# Altium PCB Main.PcbDoc
Units mm, origin at the board's own origin, x right, y up, seen from the top; angles counter-clockwise.
Board outline 37 x 67 mm, 4 copper layers (Top Layer, Ground Layer, Power Layer, Bottom Layer), stack 1.591 mm thick; 41 components, 75 nets, 233 pads, 49 vias.
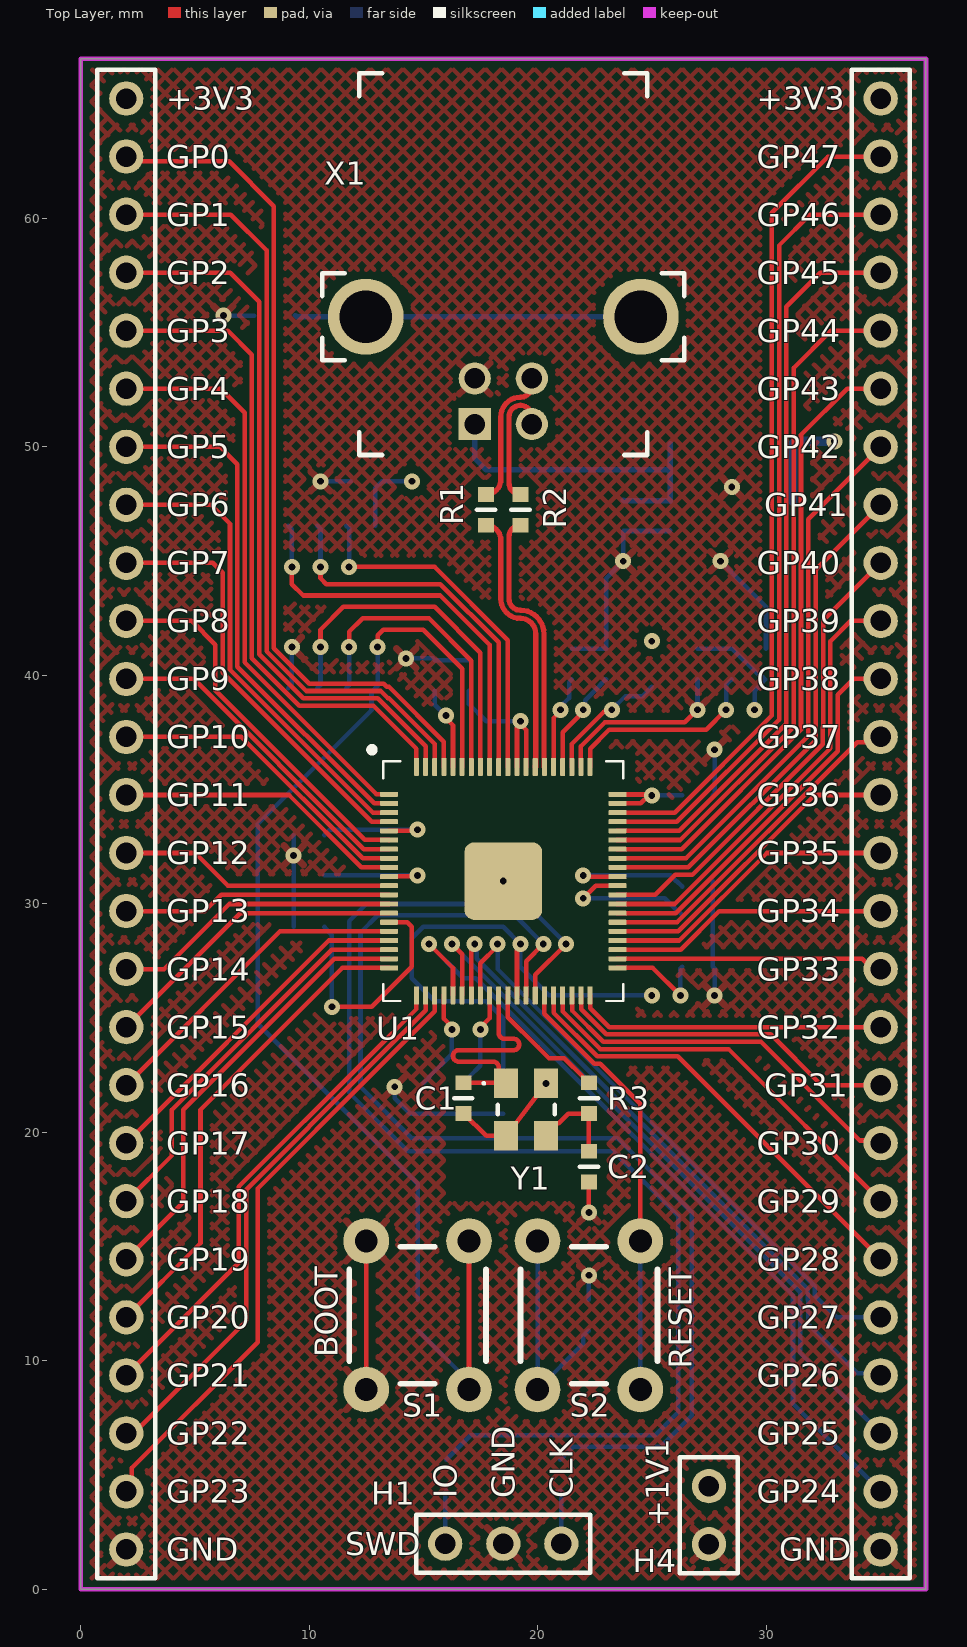
[diagram p0: Top Layer view]
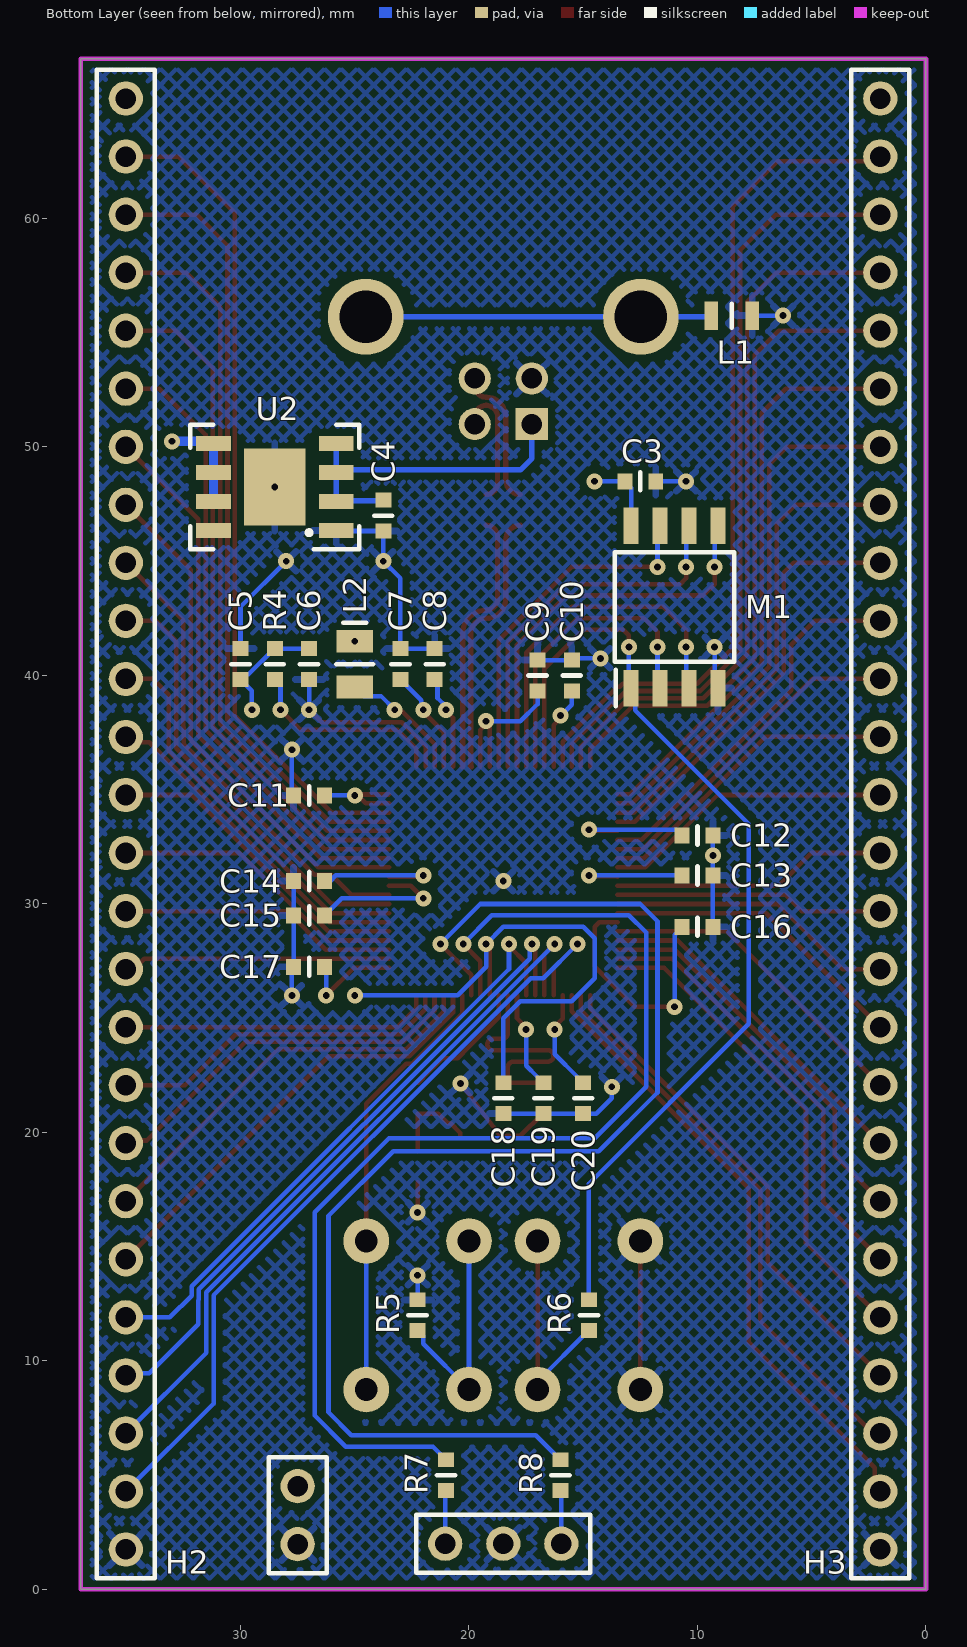
[diagram p1: Bottom Layer view, seen from below]
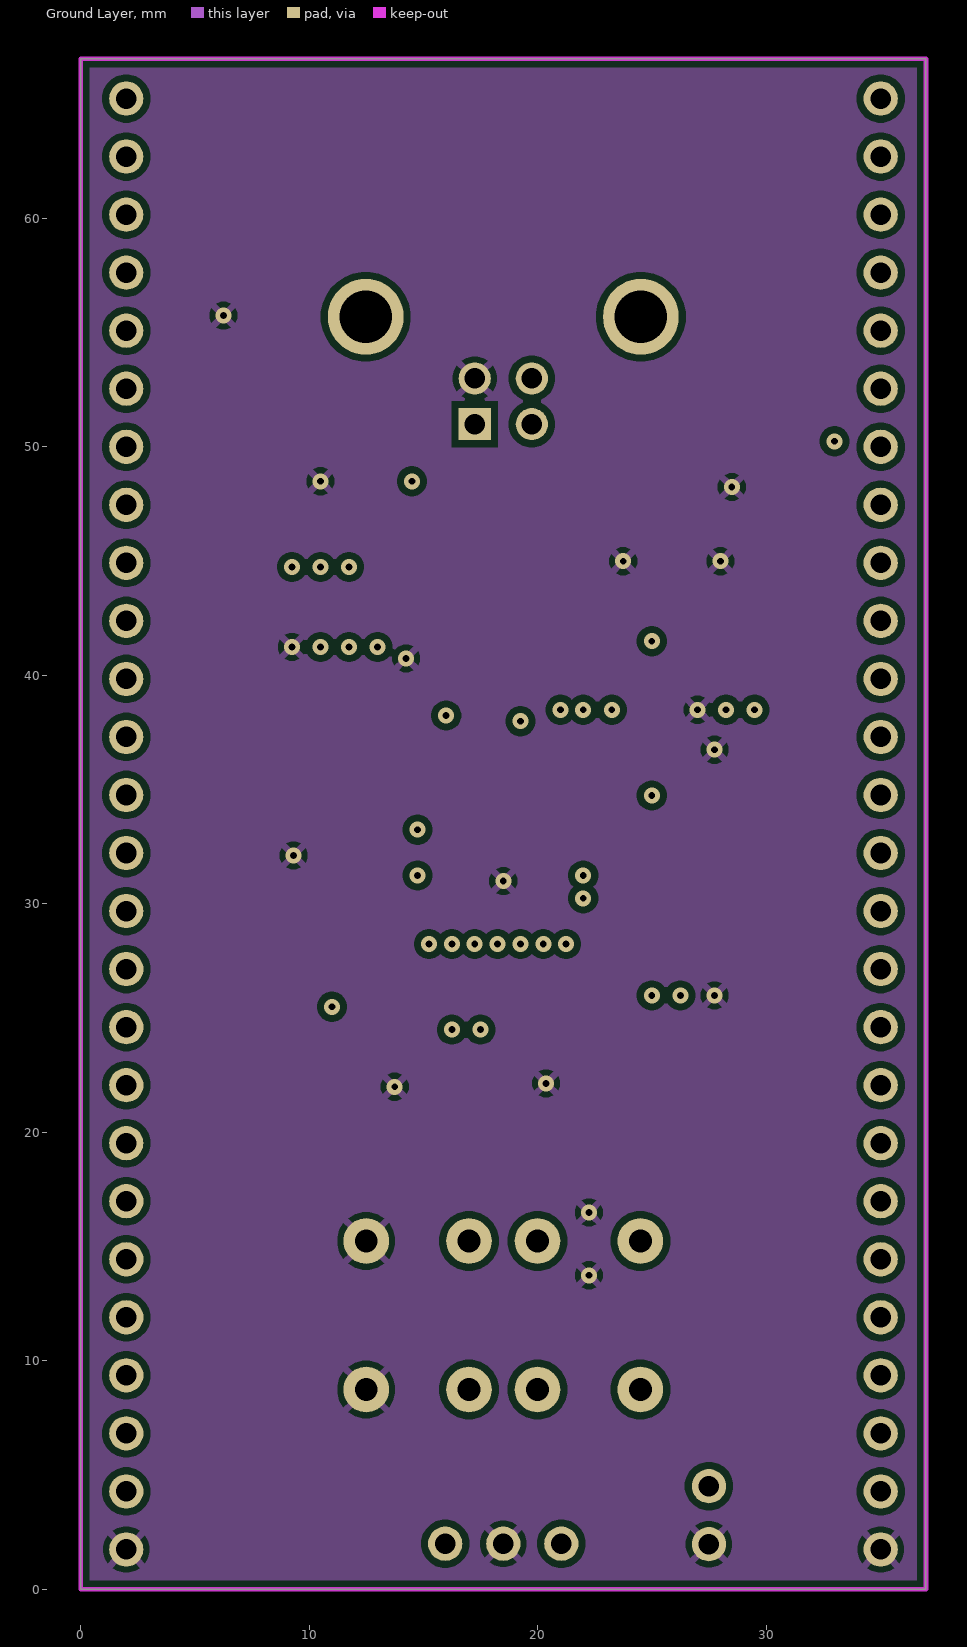
[diagram p2: Ground Layer]
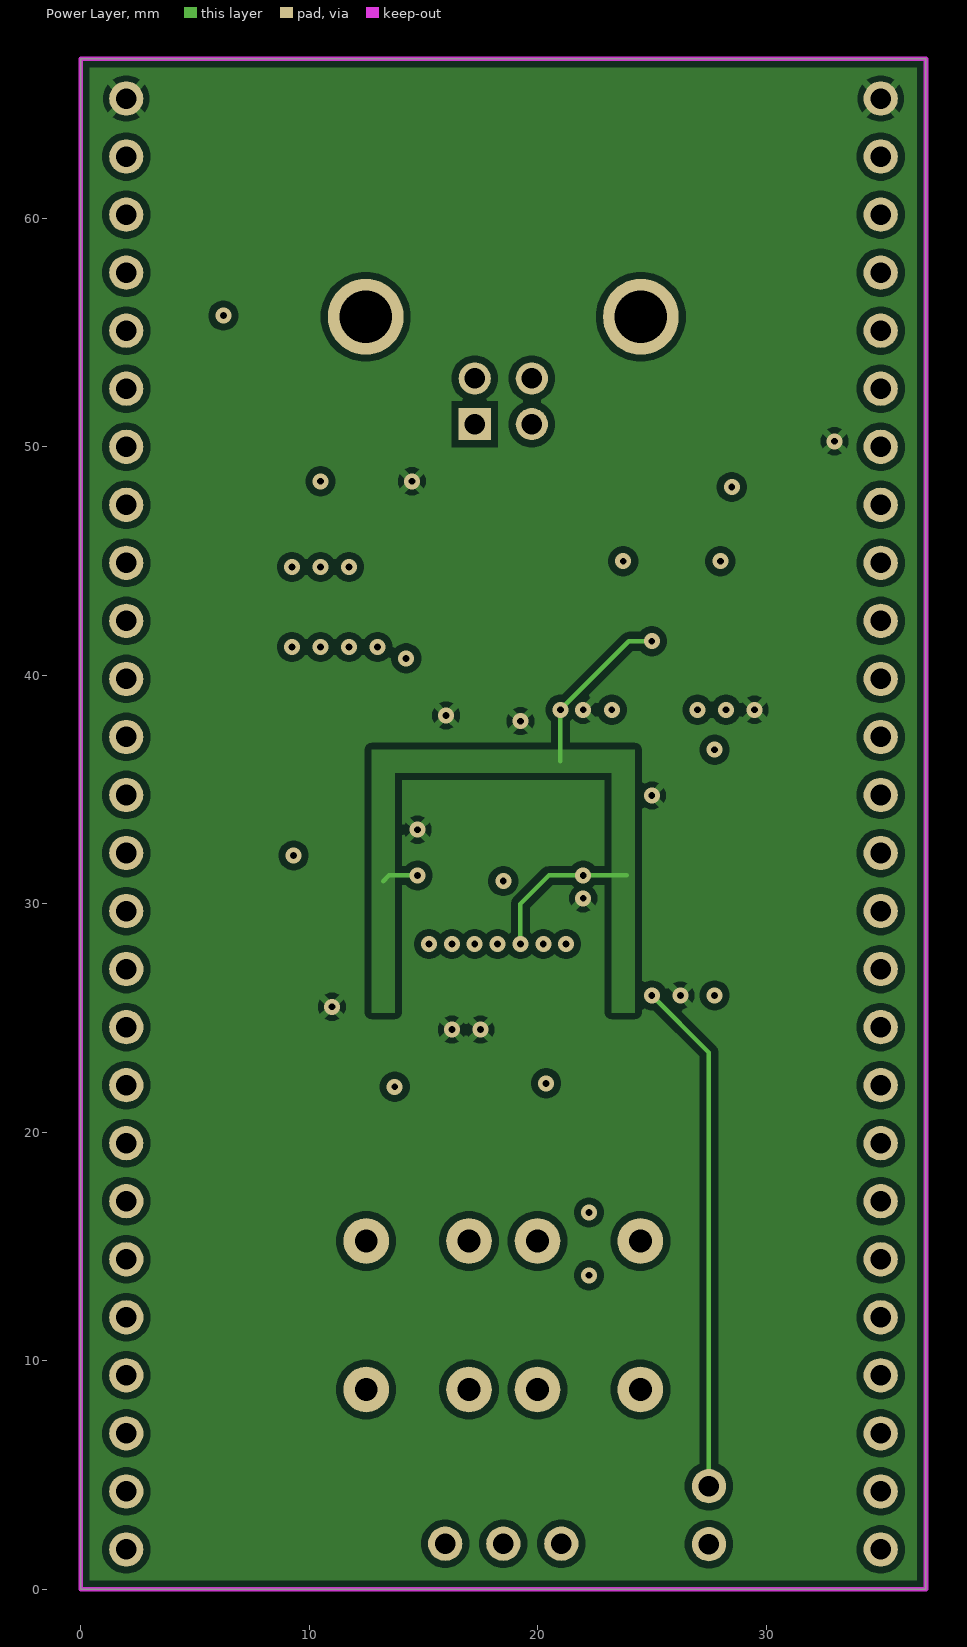
[diagram p3: Power Layer]

## Layer stack, top to bottom
Top Solder: solder mask 0.0102, Solder Resist, Dk 3.8
Top Layer: signal copper 0.035
Dielectric 2: prepreg 0.2104, 7628*1, Dk 4.4
Ground Layer: signal copper 0.0175
Dielectric 1: dielectric 1.065, FR-4, Dk 4.8
Power Layer: signal copper 0.0175
Dielectric 3: prepreg 0.2104, 7628*1, Dk 4.4
Bottom Layer: signal copper 0.035
Bottom Solder: solder mask 0.0102, Solder Resist, Dk 3.8

## Board outline
0,0 0,67 37,67 37,0

## Design rules (kind name [scope] priority, off if disabled: settings)
BoardOutlineClearance [All] p1: gap=0.2 ignorepadtopadclearanceinfootprint=FALSE
Clearance "inPolygon Clearance" [InPolygon] p1: gap=0.3 ignorepadtopadclearanceinfootprint=TRUE // this rule ensures that every net within a polygon of a different net has a set clearance from the poly
Clearance "Different Diff Pair" [All] p2: gap=0.2 ignorepadtopadclearanceinfootprint=TRUE
Clearance "Same Diff Pair" [All] p3: gap=0.1 ignorepadtopadclearanceinfootprint=TRUE
Clearance "Different Nets" [not InAnyDifferentialPair] p4: gap=0.3 ignorepadtopadclearanceinfootprint=TRUE except(0.1: Arc-SMDPad Arc-THPad Arc-Via Arc-Text Track-SMDPad Track-THPad Track-Via Track-Text SMDPad-Text THPad-Text Via-Text Fill-Text Poly-Text Region-Text Text-Text; 0.12: Arc-Arc Arc-Track Track-Track; 0.15: SMDPad-SMDPad SMDPad-THPad SMDPad-Via THPad-THPad THPad-Via Via-Via; 0.2: Arc-Hole Track-Hole SMDPad-Hole THPad-Hole Via-Hole Fill-Hole Poly-Hole Region-Hole Text-Hole)
Clearance "Same Net" [not InAnyDifferentialPair] p5: gap=0 ignorepadtopadclearanceinfootprint=TRUE except(0.1: THPad-Via; 0.18: Arc-Arc Arc-Track Track-Track)
ComponentClearance [All] p1: gap=0.102 collisioncheckmode=3 verticalgap=0.102 showdistances=TRUE
DiffPairsRouting "Ethernet Routing" [InDifferentialPairClass('Ethernet_Pairs')] p1: maxlimit=0.25 minlimit=0.2 mostfreqgap=0.25 toplayer_maxgap=0.2 toplayer_prefgap=0.2 toplayer_minwidth=0.25 toplayer_maxwidth=0.25 toplayer_prefwidth=0.25 midlayer1_mingap=0.25 midlayer1_minwidth=0.19 midlayer1_maxwidth=0.19 midlayer1_prefwidth=0.19 midlayer2_mingap=0.25 midlayer2_minwidth=0.19 midlayer2_maxwidth=0.19 midlayer2_prefwidth=0.19 bottomlayer_maxgap=0.2 bottomlayer_prefgap=0.2 bottomlayer_minwidth=0.25 bottomlayer_maxwidth=0.25 bottomlayer_prefwidth=0.25 impedanceprofiledriven=TRUE maxuncoupledlength=12.7
DiffPairsRouting "USB Routing" [InDifferentialPairClass('USB_Pairs')] p2: maxlimit=0.291 minlimit=0.127 mostfreqgap=0.291 toplayer_maxgap=0.127 toplayer_prefgap=0.127 toplayer_minwidth=0.23 toplayer_maxwidth=0.23 toplayer_prefwidth=0.23 midlayer1_mingap=0.291 midlayer1_minwidth=0.25 midlayer1_maxwidth=0.25 midlayer1_prefwidth=0.25 midlayer2_mingap=0.291 midlayer2_minwidth=0.25 midlayer2_maxwidth=0.25 midlayer2_prefwidth=0.25 bottomlayer_maxgap=0.127 bottomlayer_prefgap=0.127 bottomlayer_minwidth=0.23 bottomlayer_maxwidth=0.23 bottomlayer_prefwidth=0.23 impedanceprofiledriven=TRUE impedanceprofileid={F14BA31F-77FA-453E-8734-53F45B48A614} impedanceprofilevalue=90.000000 maxuncoupledlength=12.7
DiffPairsRouting "CAN Routing" [InDifferentialPairClass('CAN_Pairs')] p3: maxlimit=0.907 minlimit=0.5 mostfreqgap=0.907 toplayer_maxgap=0.5 toplayer_prefgap=0.5 toplayer_minwidth=0.201 toplayer_maxwidth=0.201 toplayer_prefwidth=0.201 midlayer1_mingap=0.907 midlayer1_minwidth=0.155 midlayer1_maxwidth=0.155 midlayer1_prefwidth=0.155 midlayer2_mingap=0.907 midlayer2_minwidth=0.155 midlayer2_maxwidth=0.155 midlayer2_prefwidth=0.155 bottomlayer_maxgap=0.5 bottomlayer_prefgap=0.5 bottomlayer_minwidth=0.201 bottomlayer_maxwidth=0.201 bottomlayer_prefwidth=0.201 impedanceprofiledriven=TRUE maxuncoupledlength=12.7
Height [All] p1: minheight=0 maxheight=1816.048 prefheight=12.7
HoleSize [All] p1: absolutevalues=TRUE maxlimit=6.3 minlimit=0.3 maxpercent=80.000 minpercent=20.000
HoleToHoleClearance [All] p1: gap=0.25 allowstackedmicrovias=FALSE
Length [All] p1: maxlimit=43.432 minlimit=0 usedelayunits=TRUE mindelay=0.000000 maxdelay=10000.000000
MatchedLengths "Diff Pair Matched Delays" [InDifferentialPairClass('Ethernet_Pairs') or InDifferentialPairClass('USB_Pairs') or InDifferentialPairClass('CAN_Pairs')] p1: tolerance=5 checknetsindiffpair=TRUE checkdiffpairvsdiffpair=FALSE checkxsignals=FALSE checkothers=FALSE usedelayunits=TRUE delaytolerance=100.000000
MinimumAnnularRing [All] p1: minimumring=0.2
MinimumSolderMaskSliver [All] p1: minsoldermaskwidth=0
PlaneClearance "Supply Net Clearance" [InNetClass('Supply_Nets')] p1: clearance=0.5
PlaneClearance "All Nets" [All] p2: clearance=0.3
PolygonConnect "Supply Nets" [InNetClass('Supply_Nets')] p1: connectstyle=Relief reliefconductorwidth=0.3 reliefentries=4 polygonreliefangle="90 Angle" conductorbypadedge=TRUE mindistance=0.381 enablemindistance=FALSE airgapwidth=0.254
PolygonConnect General [All] p2: connectstyle=Relief reliefconductorwidth=0.254 reliefentries=4 polygonreliefangle="90 Angle" airgapwidth=0.254
RoutingVias [All] p1: holewidth=0.2 width=0.35 viastyle="Through Hole" minholewidth=0.15 minwidth=0.3 maxholewidth=6.3 maxwidth=6.55
SilkToSilkClearance [All] p1: silktosilkclearance=0
SilkToSolderMaskClearance [All] p1: minsilkscreentomaskgap=0 clearancetoexposedcopper=TRUE
SolderMaskExpansion [All] p1: expansion=0.075 istentingtop=FALSE
SupplyNets "Schematic Supply Nets_3" [InNet('GND')] p1: voltage=0.000
SupplyNets "Schematic Supply Nets_8" [InNet('RUN')] p2: voltage=0.000
SupplyNets "Schematic Supply Nets_6" [InNet('XOUT')] p3: voltage=0.000
SupplyNets "Schematic Supply Nets_4" [InNet('+1V1')] p4: voltage=0.000
SupplyNets "Schematic Supply Nets_2" [InNet('+5V')] p5: voltage=0.000
SupplyNets "Schematic Supply Nets" [InNet('XIN')] p6: voltage=0.000
SupplyNets "Schematic Supply Nets_7" [InNet('+3V3')] p7: voltage=0.000
SupplyNets "Schematic Supply Nets_1" [InNet('Earth')] p8: voltage=0.000
UnRoutedNet [All] p1: checkbadconnections=TRUE
Width "nRF Width" [InNetClass('nRF Signal')] p1: maxlimit=0.379 minlimit=0.263 preferedwidth=0.379 toplayer_minwidth=0.379 midlayer1_maxwidth=0.263 midlayer1_prefwidth=0.263 midlayer2_maxwidth=0.263 midlayer2_prefwidth=0.263 bottomlayer_minwidth=0.379 impedanceprofiledriven=TRUE minimp=50.000000 maximp=50.000000 favimp=50.000000 checkconnectedcopper=TRUE
Width [All] p2: maxlimit=100 minlimit=0.1 preferedwidth=0.3
20 further rules are at their usual default settings.

## Classes and differential pairs
differential pair class USB_Pairs: RP2350_D RP2350_DX
net class Supply_Nets: +3V3 +5V Earth GND
component class RP2350B: C1 C2 C3 C5 C6 C7 C8 C9 C10 C11 C12 C13 C14 C15 C16 C17 C18 C19 C20 H4 L2 M1 R1 R2 R3 R4 R5 R6 S1 S2 U1 X1 Y1
component class Power: C4 L1 U2
component class "Pin Connections": H4 R7 R8
differential pair RP2350_DX: +RP2350_DX_P -RP2350_DX_N
differential pair RP2350_D: +RP2350_D_P -RP2350_D_N

## Components (designator, comment, footprint, x,y, rotation, side; value= is the part's Value field where it differs from the comment)
C1 "[Cap] 0603 15pF 1% 100V" "[Cap] SMD 0603" 16.75,21.5 r90 top
C2 "[Cap] 0603 15pF 1% 100V" "[Cap] SMD 0603" 22.25,18.5 r90 top
C3 "[Cap] 0603 0.1uF 10% 16V" "[Cap] SMD 0603" 12.5,48.5 r0 bottom
C4 "[Cap] 0603 10uF 10% 10V" "[Cap] SMD 0603" 23.75,47 r90 bottom
C5 "[Cap] 0603 4.7uF 10% 25V" "[Cap] SMD 0603" 30,40.5 r90 bottom
C6 "[Cap] 0603 4.7uF 10% 25V" "[Cap] SMD 0603" 27,40.5 r90 bottom
C7 "[Cap] 0603 0.1uF 10% 16V" "[Cap] SMD 0603" 23,40.5 r270 bottom
C8 "[Cap] 0603 4.7uF 10% 25V" "[Cap] SMD 0603" 21.5,40.5 r90 bottom
C9 "[Cap] 0603 0.1uF 10% 16V" "[Cap] SMD 0603" 17,40 r270 bottom
C10 "[Cap] 0603 0.1uF 10% 16V" "[Cap] SMD 0603" 15.5,40 r270 bottom
C11 "[Cap] 0603 0.1uF 10% 16V" "[Cap] SMD 0603" 27,34.75 r180 bottom
C12 "[Cap] 0603 0.1uF 10% 16V" "[Cap] SMD 0603" 10,33 r0 bottom
C13 "[Cap] 0603 0.1uF 10% 16V" "[Cap] SMD 0603" 10,31.25 r0 bottom
C14 "[Cap] 0603 4.7uF 10% 25V" "[Cap] SMD 0603" 27,31 r180 bottom
C15 "[Cap] 0603 0.1uF 10% 16V" "[Cap] SMD 0603" 27,29.5 r180 bottom
C16 "[Cap] 0603 0.1uF 10% 16V" "[Cap] SMD 0603" 10,29 r0 bottom
C17 "[Cap] 0603 0.1uF 10% 16V" "[Cap] SMD 0603" 27,27.25 r180 bottom
C18 "[Cap] 0603 0.1uF 10% 16V" "[Cap] SMD 0603" 18.5,21.5 r90 bottom
C19 "[Cap] 0603 0.1uF 10% 16V" "[Cap] SMD 0603" 16.75,21.5 r90 bottom
C20 "[Cap] 0603 0.1uF 10% 16V" "[Cap] SMD 0603" 15,21.5 r90 bottom
H1 "1x3 Header" "[Header] 1x3 Male" 18.5,2 r180 top
H2 "1x26 Header" "[Header] 1x26 Male" 35.02,33.5 r270 bottom
H3 "1x26 Header" "[Header] 1x26 Male" 2,33.5 r270 bottom
H4 "1x2 Header" "[Header] 1x2 Male" 27.5,3.25 r270 top
L1 "652-MH2029-300Y" "[Ferrite] SMD 0805" 8.5,55.75 r180 bottom
L2 "[3.3uH] SMD 0806 2.1A" "[Inductor] SMD 0806" 25,40.5 r270 bottom
M1 "W25Q128JVSIM" "[Flash] 128MBit" 11,43 r90 bottom
R1 "[27] SMD 0603 1% 1/10W" "[Res] SMD 0603" 17.75,47.25 r270 top
R2 "[27] SMD 0603 1% 1/10W" "[Res] SMD 0603" 19.25,47.25 r270 top
R3 "[1k] SMD 0603 1% 1/10W" "[Res] SMD 0603" 22.25,21.5 r90 top
R4 "[33] SMD 0603 0.5% 1/16W" "[Res] SMD 0603" 28.5,40.5 r270 bottom
R5 "[1k] SMD 0603 1% 1/10W" "[Res] SMD 0603" 22.25,12 r270 bottom
R6 "[1k] SMD 0603 1% 1/10W" "[Res] SMD 0603" 14.75,12 r270 bottom
R7 "[100] SMD 0603 1% 1/10W" "[Res] SMD 0603" 21,5 r90 bottom
R8 "[100] SMD 0603 1% 1/10W" "[Res] SMD 0603" 16,5 r90 bottom
S1 "Standard pushbutton" "[SPST] Pushbutton" 14.75,12 r270 top
S2 "Standard pushbutton" "[SPST] Pushbutton" 22.25,12 r270 top
U1 "RP2350B" "[MCU] RP2350B" 18.5,31 r0 top
U2 "3V3 1.5A" "[Linear] 3V3 1.5A" 28.5,48.25 r0 bottom
X1 "USB-B" "[USB] Type-B" 18.5,51 r180 top
Y1 "XTAL 12MHz" "[Crystal] SMD 12MHz" 19.5,21 r270 top

## Footprints (in the part's own frame and the unit in brackets; to place one, negate y for a bottom-side part, rotate by r counter-clockwise, add the part's x,y. Pads: shape width x height; smd on the part's side, far side on the other; paste and mask are expansions set on the pad)
"[Cap] SMD 0603" [mm]
  rect 0.65x0.7 smd: 1(-0.675,0) 2(0.675,0)
  silkscreen extent 0,-0.4 0,0.4, body extent -0.8,-0.45 0.8,0.45, height 0.8
"[Crystal] SMD 12MHz" [mm]
  rect 1.3x1.05 smd: 1(-1.15,-0.875) 2(1.15,-0.875) 3(1.15,0.875) 4(-1.15,0.875)
  silkscreen extent -1.2,-1.9 0.2,1.25, body extent -1.6,-1.25 1.6,1.25, height 0.75
"[Ferrite] SMD 0805" [mm]
  rect 0.6x1.25 smd: 1(-0.9,0) 2(0.9,0)
  silkscreen extent 0,-0.53 0,0.53, body extent -1,-0.6 1,0.6, height 1.1
"[Flash] 128MBit" [mm] "W25Q128JVSIM"
  rect 1.6x0.65 smd: 1(-3.55,1.905) 2(-3.55,0.635) 3(-3.55,-0.635) 4(-3.55,-1.905) 5(3.55,-1.905) 6(3.55,-0.635) 7(3.55,0.635) 8(3.55,1.905)
  silkscreen extent -4.35,-2.61 2.4,2.62, body extent -3.9,-2.61 3.9,2.62, height 1.95
"[Header] 1x2 Male" [mm]
  round 1.5 hole 0.9: 1(-1.27,0) 2(1.27,0)
  silkscreen extent -2.54,-1.27 2.54,1.27, body extent -2.54,-1.27 2.54,1.27, height 9.5
"[Header] 1x3 Male" [mm]
  round 1.5 hole 0.9: 1(-2.54,0) 2(0,0) 3(2.54,0)
  silkscreen extent -3.81,-1.27 3.81,1.27, body extent -3.81,-1.27 3.81,1.27, height 9.5
"[Header] 1x26 Male" [mm]
  round 1.5 hole 0.9: 1(-31.75,0) 2(-29.21,0) 3(-26.67,0) 4(-24.13,0.001) 5(-21.59,0) 6(-19.05,0) 7(-16.51,0) 8(-13.97,0) 9(-11.43,0) 10(-8.89,0) 11(-6.35,0) 12(-3.81,0) 13(-1.27,0) 14(1.27,0) 15(3.81,0) 16(6.35,0) 17(8.89,0) 18(11.43,0) 19(13.97,0) 20(16.51,0) 21(19.05,0) 22(21.59,0) 23(24.13,0) 24(26.67,0) 25(29.21,0) 26(31.75,0)
  silkscreen extent -33.02,-1.27 33.02,1.27, body extent -33.02,-1.27 33.02,1.27, height 9.5
"[Inductor] SMD 0806" [mm]
  rect 1x1.6 smd: 1(-1,0) 2(1,0)
  silkscreen extent -1.8,-0.8 0,0.8, body extent -1,-0.8 1,0.8, height 1
"[Linear] 3V3 1.5A" [mm]
  rect 1.525x0.65 smd: 1(-2.688,1.905) 2(-2.688,0.635) 3(-2.688,-0.635) 4(-2.688,-1.905) 5(2.688,-1.905) 6(2.688,-0.635) 7(2.688,0.635) 8(2.688,1.905)
  rect 2.71x3.35 smd: 9(0,0)
  silkscreen extent -3.7,-2.73 3.7,2.73, body extent -3,-2.45 3,2.45, height 1.5
"[MCU] RP2350B" [mm]
  rrect25% 0.78x0.22 smd: 1(-5,3.8) 2(-5,3.4) 3(-5,3) 4(-5,2.6) 5(-5,2.2) 6(-5,1.8) 7(-5,1.4) 8(-5,1) 9(-5,0.6) 10(-5,0.2) 11(-5,-0.2) 12(-5,-0.6) 13(-5,-1) 14(-5,-1.4) 15(-5,-1.8) 16(-5,-2.2) 17(-5,-2.6) 18(-5,-3) 19(-5,-3.4) 20(-5,-3.8) 41(5,-3.8) 42(5,-3.4) 43(5,-3) 44(5,-2.6) 45(5,-2.2) 46(5,-1.8) 47(5,-1.4) 48(5,-1) 49(5,-0.6) 50(5,-0.2) 51(5,0.2) 52(5,0.6) 53(5,1) 54(5,1.4) 55(5,1.8) 56(5,2.2) 57(5,2.6) 58(5,3) 59(5,3.4) 60(5,3.8)
  rrect25% 0.22x0.78 smd: 21(-3.8,-5) 22(-3.4,-5) 23(-3,-5) 24(-2.6,-5) 25(-2.2,-5) 26(-1.8,-5) 27(-1.4,-5) 28(-1,-5) 29(-0.6,-5) 30(-0.2,-5) 31(0.2,-5) 32(0.6,-5) 33(1,-5) 34(1.4,-5) 35(1.8,-5) 36(2.2,-5) 37(2.6,-5) 38(3,-5) 39(3.4,-5) 40(3.8,-5) 61(3.8,5) 62(3.4,5) 63(3,5) 64(2.6,5) 65(2.2,5) 66(1.8,5) 67(1.4,5) 68(1,5) 69(0.6,5) 70(0.2,5) 71(-0.2,5) 72(-0.6,5) 73(-1,5) 74(-1.4,5) 75(-1.8,5) 76(-2.2,5) 77(-2.6,5) 78(-3,5) 79(-3.4,5) 80(-3.8,5)
  rrect25% 3.4x3.4 smd: Pad(0,0)
  silkscreen extent -5.85,-5.25 5.25,5.85, body extent -5.05,-5.05 5.05,5.05, height 0.96
"[Res] SMD 0603" [mm]
  rect 0.65x0.7 smd: 1(-0.675,0) 2(0.675,0)
  silkscreen extent 0,-0.4 0,0.4, body extent -0.8,-0.45 0.8,0.45, height 0.8
"[SPST] Pushbutton" [mm] "(Regular pushbutton)"
  round 2 hole 1: 1(-3.25,2.25) 1(3.25,2.25) 2(-3.25,-2.25) 2(3.25,-2.25)
  silkscreen extent -3,-3 3,3, body extent -3.85,-3 3.85,3, height 4.95
"[USB] Type-B" [mm] "USB-B-S-F-B-TH"
  rect 1.408x1.408 hole 0.9: 1(1.25,0)
  round 1.408 hole 0.9: 2(-1.25,0) 3(-1.25,-2) 4(1.25,-2)
  round 3.316 hole 2.3: MH(-6.02,-4.7) MH(6.02,-4.7)
  silkscreen extent -7.93,-15.35 7.93,1.35, body extent -7.25,-15.1 7.25,1.4, height 10.7

## Part data
C1 C2: "GCM1885C2A150FA16D", Capacitance=15pF, Max Voltage=100V, Size Package=0603, Supplier Part Number 1=490-16416-1-ND, Tolerance=1%, Supplier 1=DigiKey
C3 C7 C9 C10 C11 C12 C13 C15 C16 C17 C18 C19 C20: "CC0603KRX7R7BB104", Capacitance=100nF, Max Voltage=16V, Size Package=0603, Supplier Part Number 1=311-1088-6-ND, Tolerance=10%, Supplier 1=DigiKey
C4: "CL10A106KP8NNNC", Capacitance=10uF, Max Voltage=10V, Size Package=0603, Supplier Part Number 1=1276-1192-6-ND, Tolerance=10%, Supplier 1=DigiKey
C5 C6 C8 C14: "GRM188R61E475KE11D", Capacitance=4.7uF, Max Voltage=25V, Size Package=0603, Supplier Part Number 1=490-7203-6-ND, Tolerance=10%, Supplier 1=DigiKey
H1: library part "[Header] 1x3 Male", "2.54mm pitch"
H2 H3: library part "[Header] 1x26 Male", "2.54mm pitch"
H4: library part "[Header] 1x2 Male", "2.54mm pitch"
L1: library part "[Ferrite] SMD 0805 3A 30ohm", Res @ Freq="30 @ 100MHz", Size Package=0805, Supplier Part Number 1=MH2029-300YCT-ND, Supplier 1=DigiKey
L2: "AOTA-B201610S3R3-101-T", Inductance=3.3uH, Package=0806, Supplier Part Number 1=535-AOTA-B201610S3R3-101-TCT-ND, Supplier 1=DigiKey
M1: library part "[Flash] 128MBit", Supplier Part Number 1=W25Q128JVSIM-ND, Supplier 1=DigiKey
R1 R2: "MCT06030C2709FP500", Resistance=27, Size Package=0603, Supplier Part Number 1=749-1631-1-ND, Tolerance=1%, Supplier 1=DigiKey, Wattage=1/10W
R3 R5 R6: "RMCF0603FT1K00", Resistance=1k, Size Package=0603, Supplier Part Number 1=RMCF0603FT1K00DKR-ND, Tolerance=1%, Supplier 1=DigiKey, Wattage=1/10W
R4: "RR0816Q-330-D", Resistance=33, Size Package=0603, Supplier Part Number 1=RR08Q33DDKR-ND, Tolerance=0.5%, Supplier 1=DigiKey, Wattage=1/16W
R7 R8: "RC0603FR-07100RL", Resistance=100, Size Package=0603, Supplier Part Number 1=311-100HRDKR-ND, Tolerance=1%, Supplier 1=DigiKey, Wattage=1/10W
S1 S2: library part "[SPST] Pushbutton", Supplier Part Number 1=450-1650-ND, Supplier 1=DigiKey
U1: library part "[MCU] RP2350B", "QFN-80 Package", Supplier Part Number 1=2648-SC1510-A4CT-ND, Supplier 1=DigiKey
U2: library part "[Linear] 3V3 1.5A", "AP7362A-33SP-13", Supplier Part Number 1=AP7362A-33SP-13DICT-ND, Supplier 1=DigiKey
X1: library part "[USB] Type-B", "USB-B-S-F-B-TH", Supplier Part Number 1=SAM10867-ND, Supplier 1=DigiKey
Y1: library part "[Crystal] SMD 12MHz", "815-ABM8-272-T3", Supplier Part Number 1=535-ABM8-272-T3CT-ND, Supplier 1=DigiKey

## Via types
v1: diameter 0.7, hole 0.3, Top Layer to Bottom Layer, 49 vias

## Nets (pads, with @x,y where several pads share a name; then routed paths per layer and width w, separated by ;. In a path a pad name is that pad's centre, name@x,y a point inside that pad or via, vN(x,y) a via of type N, cw(c..) or ccw(c..) an arc to the next point about the centre after c; other vN are vias at no path point)
+1V1: C8.1 C13.2 C14.2 C18.2 H4.1 L2.1 U1.10 U1.32 U1.51 U1.65 | length 78.3
  Top Layer w0.2: U1.10 13.51,31.21 14.71,31.21 v1(14.75,31.25) ; U1.32 19.1,27.965 19.25,28.115 v1(19.25,28.25) ; U1.65 20.7,38.139 21,38.439 v1(21,38.5) ; v1(22,31.25) 22.05,31.2 U1.51
  Power Layer w0.2: 13.25,31 13.5,31.25 v1(14.75,31.25) ; v1(19.25,28.25) 19.25,30 20.5,31.25 v1(22,31.25) 23.912,31.25 ; 21,36.25 v1(21,38.5) 24,41.5 v1(25,41.5) ; v1(25,26) 27.5,23.5 H4.1
  Bottom Layer w0.2: C13.2 v1(14.75,31.25) ; C18.2 18.5,25 17.75,25.75 15.5,25.75 14.5,26.75 14.5,28.5 15,29 18.5,29 v1(19.25,28.25) 19.25,27.25 20.5,26 v1(25,26) ; v1(21,38.5) 21,38.634 21.379,39.012 21.379,39.704 C8.1 ; v1(22,31.25) 25.825,31.25 26.075,31 26.1,31 26.325,30.775 C14.2@26.325,30.75
+3V3: C3.2 C5.1 C6.2 C7.2 C9.2 C10.2 C11.2 C12.2 C15.2 C16.2 C17.2 C19.2 C20.2 H2.1 H3.1 M1.8 R4.1 U1.5 U1.15 U1.24 U1.29 U1.41 U1.50 U1.59 U1.60 U1.64 U1.68 U1.69 U1.76 U2.5 U2.6 U2.7 | length 68.2
  Top Layer w0.2: v1(11,25.5) 12.75,25.5 14.5,27.25 14.5,29 14.3,29.2 U1.15 ; U1.5 13.51,33.21 14.71,33.21 v1(14.75,33.25) ; U1.24 15.9,24.985 16.25,24.635 v1(16.25,24.5) ; v1(16,38.25) 16,38.115 16.3,37.815 U1.76 ; v1(17.5,24.5) 17.5,24.591 17.9,24.991 U1.29 ; U1.69 19.1,37.715 19.25,37.865 19.5,37.615 U1.68 ; U1.64 21.1,37.512 22,38.412 v1(22,38.5) ; v1(22,30.25) 22.55,30.8 U1.50 ; U1.41 25.05,27.2 v1(26.25,26) ; U1.59 24.515,34.4 v1@24.865,34.75 ; U1.60 23.51,34.79 v1@24.865,34.79
  Bottom Layer w0.2: C16.2 10.675,28.975 11,28.65 v1(11,25.5) ; C12.2 10.675,33.025 10.9,33.25 v1(14.75,33.25) ; M1.8 12.905,48.205 13.175,48.475 C3.2 v1(14.5,48.5) ; C20.2 15.025,22.175 15.25,22.4 15.25,22.425 16.25,23.425 v1(16.25,24.5) ; C10.2 15.5,38.72 15.97,38.25 v1(16,38.25) ; C19.2 16.775,22.175 17,22.4 17,22.425 17.5,22.925 v1(17.5,24.5) ; C9.2 17,38.75 17.75,38 v1(19.25,38) ; v1(22,30.25) 25.575,30.25 26.075,29.75 26.1,29.75 26.325,29.525 C15.2 ; v1(22,38.5) 22.093,38.593 22.093,38.918 22.75,39.575 22.75,39.6 22.975,39.825 C7.2 ; v1(25,34.75) C11.2 ; v1(26.25,26) 26.25,27.175 C17.2 ; C6.2 R4.1 28.525,41.175 29.65,40.05 29.75,40.05 29.975,39.825 29.75,39.6 29.75,39.575 29.5,39.325 v1(29.5,38.5)
  Bottom Layer w0.4: U2.7 U2.6 U2.5 31.283,50.25 v1(33,50.25)
+5V: C4.2 U2.2 U2.3 U2.4 X1.1 | length 14.9
  Bottom Layer w0.23: X1.1 17.25,49.5 17.75,49 25.697,49 U2.3 ; C4.2 23.78,47.645 25.782,47.645 U2.2 U2.3 ; U2.4 U2.3
Earth: L1.1 X1.MH | length 15.1
  Bottom Layer w0.23: L1.1 9.45,55.7 12.48,55.7 X1.MH@24.52,55.7
GND: C1.1 C2.1 C3.1 C4.1 C5.2 C6.1 C7.1 C8.2 C9.1 C10.1 C11.1 C12.1 C13.1 C14.1 C15.1 C16.1 C17.1 C18.1 C19.1 C20.1 H1.2 H2.26 H3.26 H4.2 L1.2 M1.4 R5.1 S1.2 U1.62 U1.Pad U2.1 U2.9 X1.4 Y1.2 Y1.4 | length 59.7
  Top Layer w0.2: S1.2@12.5,8.75 S1.2@12.5,15.25 ; C1.1 16.775,20.825 17.75,19.85 Y1.2 19.05,20.4 19.95,21.6 v1(20.375,22.15) ; U1.62 21.9,36.9 22.95,37.95 26.45,37.95 v1(27,38.5) ; v1(22.25,16.5) C2.1
  Bottom Layer w0.2: v1(6.25,55.75) L1.2 ; M1.4 9.25,39.605 v1(9.25,41.25) ; C16.1 C13.1 v1(9.325,32.125) C12.1 ; v1(10.5,48.5) C3.1 ; v1(13.75,22) 13.755,21.995 13.755,21.495 14.425,20.825 C20.1 C19.1 C18.1 ; v1(14.25,40.75) 15.425,40.75 C10.1 C9.1 ; C8.2 C7.1 23,44.25 v1(23.75,45) C4.1 25.792,46.325 U2.1 ; R5.1 v1(22.25,13.75) ; v1(27,38.5) C6.1 ; C14.1 C15.1 C17.1 27.75,27.175 v1(27.75,26) ; C11.1 27.75,34.825 v1(27.75,36.75) ; v1(28,45) 30,43 C5.2
  other v1: 18.5,31 28.5,48.25
GP0: H3.2 U1.77 | length 36.9
  Top Layer w0.2: H3.2 2.209,62.5 6.5,62.5 8.46,60.54 8.46,41.195 10.015,39.64 13.265,39.64 13.405,39.5 13.5,39.5 15.9,37.1 U1.77
GP1: H3.3 U1.78 | length 34.4
  Top Layer w0.2: H3.3 6.58,60.17 8.14,58.61 8.14,41.063 9.883,39.32 13.133,39.32 13.453,39 13.5,39 15.5,37 U1.78
GP2: H3.4 U1.79 | length 31.6
  Top Layer w0.2: H3.4 6.55,57.63 7.82,56.36 7.82,40.93 9.75,39 13,39 15.1,36.9 U1.79
GP3: H3.5 U1.80 | length 28.9
  Top Layer w0.2: H3.5 6.45,55.09 7.5,54.04 7.5,40.75 9.57,38.68 12.82,38.68 14.7,36.8 U1.80
GP4: H3.6 U1.1 | length 25.3
  Top Layer w0.2: H3.6 6.13,52.55 7.18,51.5 7.18,40.57 12.95,34.8 U1.1
GP5: H3.7 U1.2 | length 23.2
  Top Layer w0.2: H3.7 6.1,50.01 6.86,49.25 6.86,40.39 12.85,34.4 U1.2
GP6: H3.8 U1.3 | length 20.8
  Top Layer w0.2: H3.8 5.709,47.47 6.54,46.639 6.54,40.257 12.797,34 U1.3
GP7: H3.9 U1.4 | length 18.8
  Top Layer w0.2: H3.9 5.79,44.93 6.22,44.5 6.22,40.125 12.745,33.6 U1.4
GP8: H3.10 U1.6 | length 16.6
  Top Layer w0.2: H3.10 4.86,42.39 5.9,41.35 5.9,39.35 12.44,32.81 13.49,32.81 U1.6
GP9: H3.11 U1.7 | length 14.6
  Top Layer w0.2: H3.11 4.947,39.85 12.397,32.4 U1.7
GP10: H3.12 U1.8 | length 13.7
  Top Layer w0.2: H3.12 7.035,37.31 12.345,32 U1.8
GP11: H3.13 U1.9 | length 12.8
  Top Layer w0.2: H3.13 9.122,34.77 12.292,31.6 U1.9
GP12: H3.14 U1.11 | length 12.1
  Top Layer w0.2: H3.14 5.02,32.23 6.45,30.8 U1.11
GP13: H3.15 U1.12 | length 11.8
  Top Layer w0.2: H3.15 5.44,29.69 6.15,30.4 U1.12
GP14: H3.16 U1.13 | length 12.7
  Top Layer w0.2: H3.16 3.65,27.15 6.5,30 U1.13
GP15: H3.17 U1.14 | length 13.6
  Top Layer w0.2: H3.17 6.99,29.6 U1.14
GP16: H3.18 U1.16 | length 14.3
  Top Layer w0.2: H3.18 8.73,28.8 U1.16
GP17: H3.19 U1.17 | length 15.2
  Top Layer w0.2: H3.19 10.87,28.4 U1.17
GP18: H3.20 U1.18 | length 17.2
  Top Layer w0.2: H3.20 4,18.99 4,21 11,28 U1.18
GP19: H3.21 U1.19 | length 19.3
  Top Layer w0.2: H3.21 4.5,16.95 4.5,21 11.1,27.6 U1.19
GP20: H3.22 U1.20 | length 21.3
  Top Layer w0.2: H3.22 5.25,15.16 5.25,21 11.45,27.2 U1.20
GP21: H3.23 U1.21 | length 21.9
  Top Layer w0.2: H3.23 6.93,14.3 6.93,17.633 12.617,23.32 14.7,25.402 U1.21
GP22: H3.24 U1.22 | length 24.8
  Top Layer w0.2: H3.24 2.33,6.83 7.25,11.75 7.25,17.5 12.75,23 15.1,25.35 U1.22
GP23: H3.25 U1.23 | length 27.3
  Top Layer w0.2: H3.25 2.249,4.539 2.249,5.32 7.75,10.821 7.75,17.547 12.883,22.68 15.5,25.297 U1.23
GP24: H2.25 U1.25 | length 35.2
  Top Layer w0.2: v1(15.25,28.25) 16.3,27.2 U1.25
  Bottom Layer w0.2: v1(15.25,28.25) 16.75,26.75 17.297,26.75 31.18,12.867 31.18,8.13 H2.25
GP25: H2.24 U1.26 | length 31.6
  Top Layer w0.2: v1(16.25,28.25) 16.7,27.8 U1.26
  Bottom Layer w0.2: v1(16.25,28.25) 31.5,13 31.5,10.35 H2.24
GP26: H2.23 U1.27 | length 29.2
  Top Layer w0.2: U1.27 17.1,27.965 17.25,28.115 v1(17.25,28.25)
  Bottom Layer w0.2: v1(17.25,28.25) 17.346,28.154 17.346,27.607 31.82,13.133 31.82,12.68 31.85,12.65 31.85,11.6 33.99,9.46 34.93,9.46 H2.23 H2.23@34.961,9.429
GP27: H2.22 U1.28 | length 27
  Top Layer w0.2: U1.28 17.5,27.412 18.25,28.162 v1(18.25,28.25)
  Bottom Layer w0.2: v1(18.25,28.25) 18.25,27.155 32.14,13.265 32.14,12.86 33.09,11.91 H2.22
GP28: H2.21 U1.36 | length 19.5
  Top Layer w0.2: U1.36 20.7,25.24 22.61,23.33 26.14,23.33 H2.21
GP29: H2.20 U1.37 | length 18.1
  Top Layer w0.2: U1.37 21.1,25.292 22.742,23.65 28.36,23.65 H2.20
GP30: H2.19 U1.38 | length 16.6
  Top Layer w0.2: U1.38 21.51,25.99 21.51,25.335 22.875,23.97 29.78,23.97 34.101,19.649 34.9,19.649 H2.19
GP31: H2.18 U1.39 | length 15.1
  Top Layer w0.2: U1.39 21.91,25.99 21.91,25.388 23.007,24.29 30.21,24.29 32.43,22.07 H2.18
GP32: H2.17 U1.40 | length 13.6
  Top Layer w0.2: U1.40 22.31,25.99 22.31,25.44 23.14,24.61 H2.17
GP33: H2.16 U1.42 | length 11.7
  Top Layer w0.2: U1.42 34.218,27.6 34.668,27.15 H2.16
GP34: H2.15 U1.43 | length 12.2
  Top Layer w0.2: U1.43 26.263,28 27.953,29.69 H2.15
GP35: H2.14 U1.44 | length 13.1
  Top Layer w0.2: U1.44 26.21,28.4 30.04,32.23 H2.14
GP36: H2.13 U1.45 | length 14
  Top Layer w0.2: U1.45 26.158,28.8 32.128,34.77 H2.13
GP37: H2.12 U1.46 | length 14.9
  Top Layer w0.2: U1.46 26.105,29.2 33.99,37.084 34.794,37.084 H2.12
GP38: H2.11 U1.47 | length 17.2
  Top Layer w0.2: U1.47 26.053,29.6 33.14,36.687 33.14,39.149 33.841,39.85 H2.11
GP39: H2.10 U1.48 | length 19.4
  Top Layer w0.2: U1.48 26,30 32.82,36.82 32.82,41.5 33.71,42.39 H2.10
GP40: H2.9 U1.49 | length 20.7
  Top Layer w0.2: U1.49 25.15,30.4 26.03,31.28 26.78,31.28 32.49,36.99 32.49,37.74 32.5,37.75 32.5,42.411 H2.9
GP41: H2.8 U1.52 | length 22.5
  Top Layer w0.2: U1.52 26.6,31.6 32.17,37.17 32.17,44.621 H2.8
GP42: H2.7 U1.53 | length 24.5
  Top Layer w0.2: U1.53 26.5,32 31.85,37.35 31.85,46.841 H2.7
GP43: H2.6 U1.54 | length 27.4
  Top Layer w0.2: U1.54 26.305,32.4 31.53,37.625 31.53,50.53 33.55,52.55 H2.6
GP44: H2.5 U1.55 | length 30
  Top Layer w0.2: U1.55 26.253,32.8 31.21,37.757 31.21,53.46 32.84,55.09 H2.5
GP45: H2.4 U1.56 | length 32.3
  Top Layer w0.2: U1.56 26.2,33.2 30.89,37.89 30.89,56.14 32.38,57.63 H2.4
GP46: H2.3 U1.57 | length 34.7
  Top Layer w0.2: U1.57 26.1,33.6 30.57,38.07 30.57,58.82 31.92,60.17 H2.3
GP47: H2.2 U1.58 | length 36.3
  Top Layer w0.2: U1.58 26,34 30.25,38.25 30.25,60.25 32.71,62.71 H2.2
NetC2_2: C2.2 R3.1 Y1.3 | length 4
  Top Layer w0.2: Y1.3 20.375,19.975 20.8,20.4 20.925,20.4 21.35,20.825 R3.1 C2.2
NetH1_1: H1.1 R7.1 | length 2.3
  Bottom Layer w0.2: R7.1 21.04,4.285 H1.1
NetH1_3: H1.3 R8.1 | length 2.3
  Bottom Layer w0.2: H1.3 15.96,4.285 R8.1
NetR5_2: R5.2 S2.2 | length 10
  Bottom Layer w0.2: S2.2@20,15.25 20,8.75 22,10.75 22,11.1 22.225,11.325 R5.2
QSPI_SCLK: M1.6 U1.71 | length 16.8
  Top Layer w0.2: v1(10.5,44.75) 10.5,44.25 10.75,44 15.75,44 18.3,41.45 U1.71
  Bottom Layer w0.2: M1.6 10.5,46.415 v1(10.5,44.75)
QSPI_SD0: M1.5 U1.72 | length 17.7
  Top Layer w0.2: v1(9.25,44.75) 9.25,44 9.75,43.5 15.75,43.5 17.9,41.35 U1.72
  Bottom Layer w0.2: M1.5 9.25,46.395 v1(9.25,44.75)
QSPI_SD1: M1.2 U1.74 | length 13.5
  Top Layer w0.2: v1(11.75,41.25) 11.75,41.907 12.343,42.5 15.25,42.5 17.1,40.65 U1.74
  Bottom Layer w0.2: M1.2 11.75,39.565 v1(11.75,41.25)
QSPI_SD2: M1.3 U1.73 | length 15.8
  Top Layer w0.2: v1(10.5,41.25) 10.5,42 11.5,43 15.5,43 17.5,41 U1.73
  Bottom Layer w0.2: M1.3 10.5,39.585 v1(10.5,41.25)
QSPI_SD3: M1.7 U1.70 | length 15.7
  Top Layer w0.2: v1(11.75,44.75) 15.5,44.75 18.7,41.55 U1.70
  Bottom Layer w0.2: M1.7 11.75,46.435 v1(11.75,44.75)
QSPI_SS: M1.1 R6.1 U1.75 | length 43
  Top Layer w0.2: v1(13,41.25) 13.005,41.255 13.005,41.755 13.25,42 15,42 16.7,40.3 U1.75
  Bottom Layer w0.2: v1(13,41.25) 13,39.545 12.732,39.277 12.732,38.482 7.75,33.5 7.75,24.75 14.75,17.75 R6.1
RP2350_D_N: R2.1 X1.2 | length 5.6
  Top Layer w0.23: R2.1 cw(c19.25,48.425) 18.75,48.425 18.75,51.321 cw(c19.25,51.321) 19.25,51.821 cw(c19.25,51.321) 19.75,51.321 X1.2
RP2350_D_P: R1.1 X1.3 | length 6.2
  Top Layer w0.23: R1.1 ccw(c17.75,48.568) 18.393,48.568 18.393,51.321 cw(c19.25,51.321) 19.25,52.179 ccw(c19.25,52.679) 19.75,52.679 X1.3
RP2350_DX_N: R2.2 U1.66 | length 11.7
  Top Layer w0.23: R2.2 ccw(c19.25,46.075) 18.75,46.075 18.75,43.357 ccw(c19.25,43.357) 19.25,42.857 cw(c19.25,41.829) 20.279,41.829 20.279,36.021 ccw(c20.3,36.021) U1.66
RP2350_DX_P: R1.2 U1.67 | length 11.8
  Top Layer w0.23: R1.2 cw(c17.75,45.932) 18.393,45.932 18.393,43.357 ccw(c19.25,43.357) 19.25,42.5 cw(c19.25,41.829) 19.921,41.829 19.921,36.021 cw(c19.9,36.021) U1.67
RUN: S2.1 U1.35 | length 19.1
  Top Layer w0.2: U1.35 20.3,25.187 22.487,23 22.75,23 24.5,21.25 S2.1@24.5,15.25
  Bottom Layer w0.2: S2.1@24.5,8.75 S2.1@24.5,15.25
SWCLK: R7.2 U1.33 | length 50.4
  Top Layer w0.2: U1.33 19.5,27.5 v1(20.25,28.25)
  Bottom Layer w0.2: v1(20.25,28.25) 19,29.5 13,29.5 12.25,28.75 12.25,22 14.5,19.75 23.5,19.75 26.75,16.5 26.75,7.611 25.389,6.25 21.575,6.25 R7.2
SWDIO: R8.2 U1.34 | length 57.1
  Top Layer w0.2: U1.34 19.9,26.9 v1(21.25,28.25)
  Bottom Layer w0.2: R8.2 17.075,6.75 25.149,6.75 26.149,7.75 26.149,16.351 23.32,19.18 14.32,19.18 11.75,21.75 11.75,29.25 12.5,30 19.5,30 v1(21.25,28.25)
U\S\B\_\B\O\O\T\: R6.2 S1.1 | length 10
  Top Layer w0.2: S1.1@17,8.75 S1.1@17,15.25
  Bottom Layer w0.2: R6.2 14.775,11.325 17,9.1 S1.1@17,8.75
VREG_AVDD: R4.2 U1.61 | length 8.9
  Top Layer w0.2: U1.61 22.3,36.8 23.13,37.63 27.38,37.63 v1(28.25,38.5)
  Bottom Layer w0.2: v1(28.25,38.5) 28.25,39.6 28.475,39.825 R4.2
VREG_LX: L2.2 U1.63 | length 5.5
  Top Layer w0.2: U1.63 21.5,37 22.904,38.404 23.154,38.404 v1(23.25,38.5)
  Bottom Layer w0.2: v1(23.25,38.5) 23.85,39.1 24.6,39.1 L2.2
XIN: C1.2 U1.30 Y1.1 | length 11
  Top Layer w0.2: C1.2 18.601,22.175 Y1.1 18.3,22.476 18.3,22.75 18.3,22.85 ccw(c18.05,22.85) 18.05,23.1 16.55,23.1 cw(c16.55,23.35) 16.55,23.6 18.947,23.6 ccw(c18.947,23.85) 18.947,24.1 18.55,24.1 cw(c18.55,24.35) 18.3,24.35 18.3,25.05 U1.30
XOUT: R3.2 U1.31 | length 5.7
  Top Layer w0.2: U1.31 18.7,25.05 20,23.75 20.5,23.25 21.175,23.25 22,22.425 22,22.4 22.225,22.175 R3.2
pads on no net: U2.8

## Polygon pours and split planes (outlines as drawn)
+3V3 on Power Layer "+3V3 Power Poly" (solid, remove dead copper, pour order 1): 0,0 0,67 37,67 37,0
+1V1 on Power Layer "+1V1 Power Net" (solid, remove dead copper, pour order 0): 24.25,25.25 23.25,25.25 23.25,35.75 13.75,35.75 13.75,25.25 12.75,25.25 12.75,36.75 24.25,36.75
GND on Ground Layer "GND Poly" (solid, remove dead copper, pour order 2): 37,67 0,67 0,0 37,0
GND on Top Layer "GND Top Poly" (hatched 45Degree grid 0.508 track 0.203, remove dead copper, pour order 3): 0,67 0,0 37,0 37,67
GND on Bottom Layer "GND Bottom Poly" (hatched 45Degree grid 0.508 track 0.203, remove dead copper, pour order 4): 0,67 0,0 37,0 37,67

## Keep-outs
Keep-Out Layer:
  the board outline again, w0.2

## Other copper
Top Layer:
  pour cut-out: 23,23.25 16,23.25 16,17 23,17
  pour cut-out: 12.75,25.25 12.75,36.75 24.25,36.75 24.25,25.25

## Silkscreen, mask and mechanical layers (free items; w line width, h text height)
Top Overlay:
  text "+3V3" at 3.75,64.75 h1
  text "+3V3" at 29.585,64.75 h1
  text "GP0" at 3.75,62.21 h1
  text "GP47" at 29.585,62.21 h1
  text "GP1" at 3.75,59.67 h1
  text "GP46" at 29.585,59.67 h1
  text "GP2" at 3.75,57.13 h1
  text "GP45" at 29.585,57.13 h1
  text "GP3" at 3.75,54.59 h1
  text "GP44" at 29.585,54.59 h1
  text "GP4" at 3.75,52.05 h1
  text "GP43" at 29.585,52.05 h1
  text "GP5" at 3.75,49.51 h1
  text "GP42" at 29.585,49.51 h1
  text "GP6" at 3.75,46.97 h1
  text "GP41" at 29.918,46.97 h1
  text "GP7" at 3.75,44.43 h1
  text "GP40" at 29.585,44.43 h1
  text "GP8" at 3.75,41.89 h1
  text "GP39" at 29.585,41.89 h1
  text "GP9" at 3.75,39.35 h1
  text "GP38" at 29.585,39.35 h1
  text "GP10" at 3.75,36.81 h1
  text "GP37" at 29.585,36.81 h1
  text "GP11" at 3.75,34.27 h1
  text "GP36" at 29.585,34.27 h1
  text "GP12" at 3.75,31.73 h1
  text "GP35" at 29.585,31.73 h1
  text "GP13" at 3.75,29.19 h1
  text "GP34" at 29.585,29.19 h1
  text "GP14" at 3.75,26.65 h1
  text "GP33" at 29.585,26.65 h1
  text "GP15" at 3.75,24.11 h1
  text "GP32" at 29.585,24.11 h1
  text "GP16" at 3.75,21.57 h1
  text "GP31" at 29.918,21.57 h1
  text "GP17" at 3.75,19.03 h1
  text "GP30" at 29.585,19.03 h1
  text "GP18" at 3.75,16.49 h1
  text "GP29" at 29.585,16.49 h1
  text "GP19" at 3.75,13.95 h1
  text "GP28" at 29.585,13.95 h1
  text "GP20" at 3.75,11.41 h1
  text "GP27" at 29.585,11.41 h1
  text "BOOT" at 11.25,10.167 h1 r90
  text "RESET" at 26.75,9.667 h1 r90
  text "GP21" at 3.75,8.87 h1
  text "GP26" at 29.585,8.87 h1
  text "GP22" at 3.75,6.33 h1
  text "GP25" at 29.585,6.33 h1
  text "IO" at 16.46,4 h1 r90
  text "GND" at 19,4 h1 r90
  text "CLK" at 21.54,4 h1 r90
  text "GP23" at 3.75,3.79 h1
  text "GP24" at 29.585,3.79 h1
  text "+1V1" at 25.75,2.75 h1 r90
  text "SWD" at 11.584,1.5 h1
  text "GND" at 3.75,1.25 h1
  text "GND" at 30.584,1.25 h1
Poly Planning:
  lines w0.2: 12.75,25.25 13.75,25.25 13.75,35.75 23.25,35.75 23.25,25.25 24.25,25.25 24.25,36.75 12.75,36.75 12.75,25.25